# Altium PCB 遥控器副板.PcbDoc
Units mil, origin at the board's own origin, x right, y up, seen from the top; angles counter-clockwise.
Board outline 1584.83 x 3160.29 mil, 2 copper layers (Top Layer, Bottom Layer); 39 components, 34 nets, 151 pads, 108 vias.
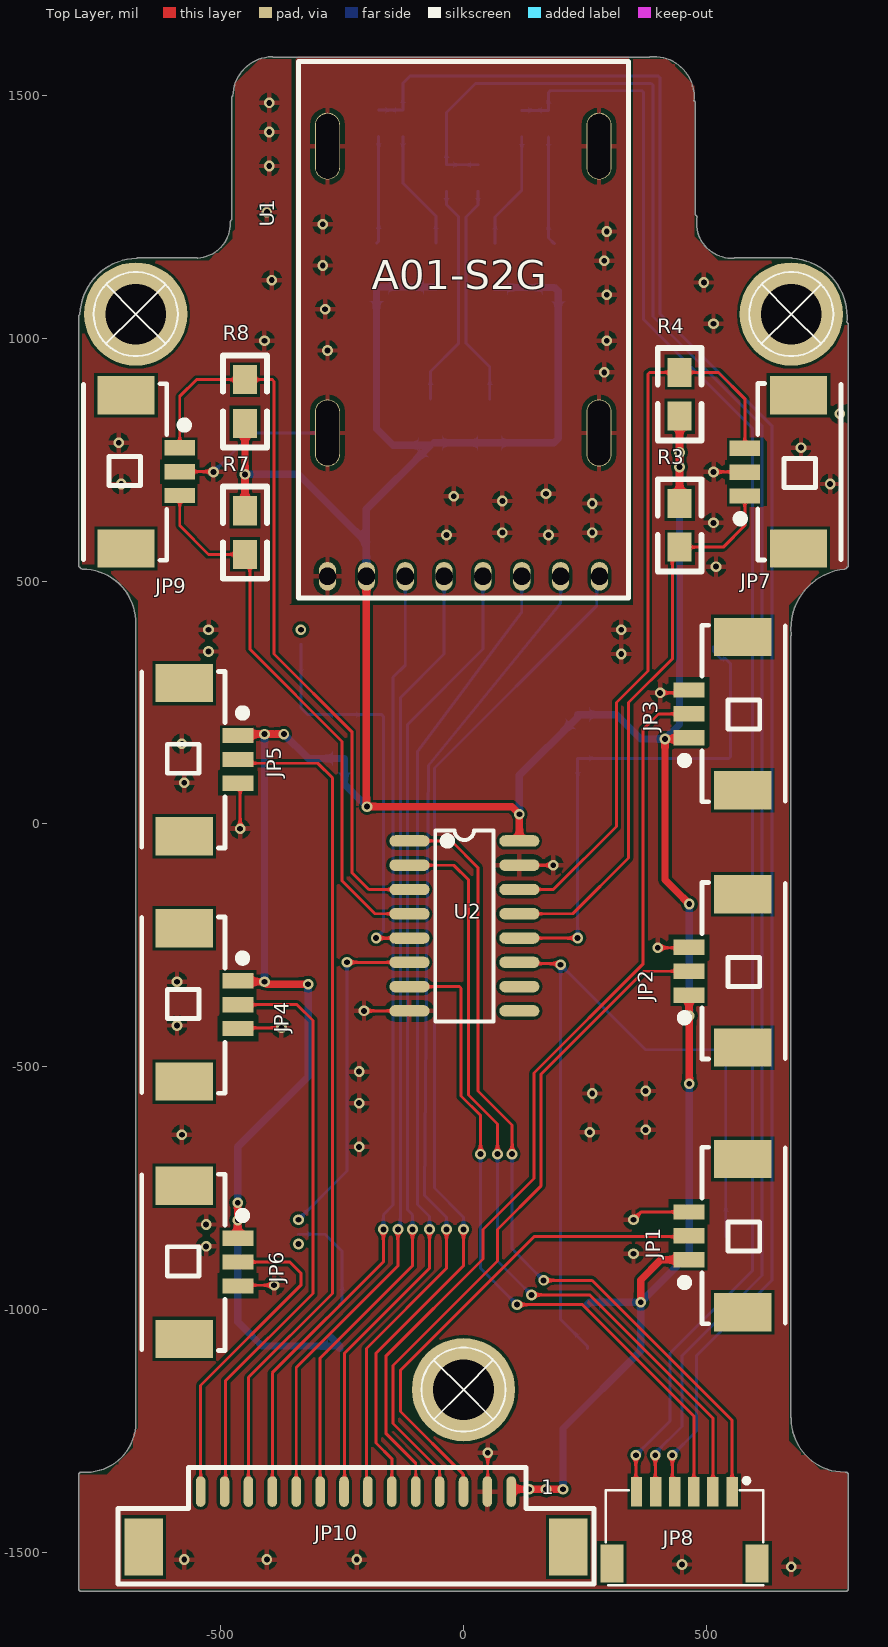
[diagram p0: Top Layer view]
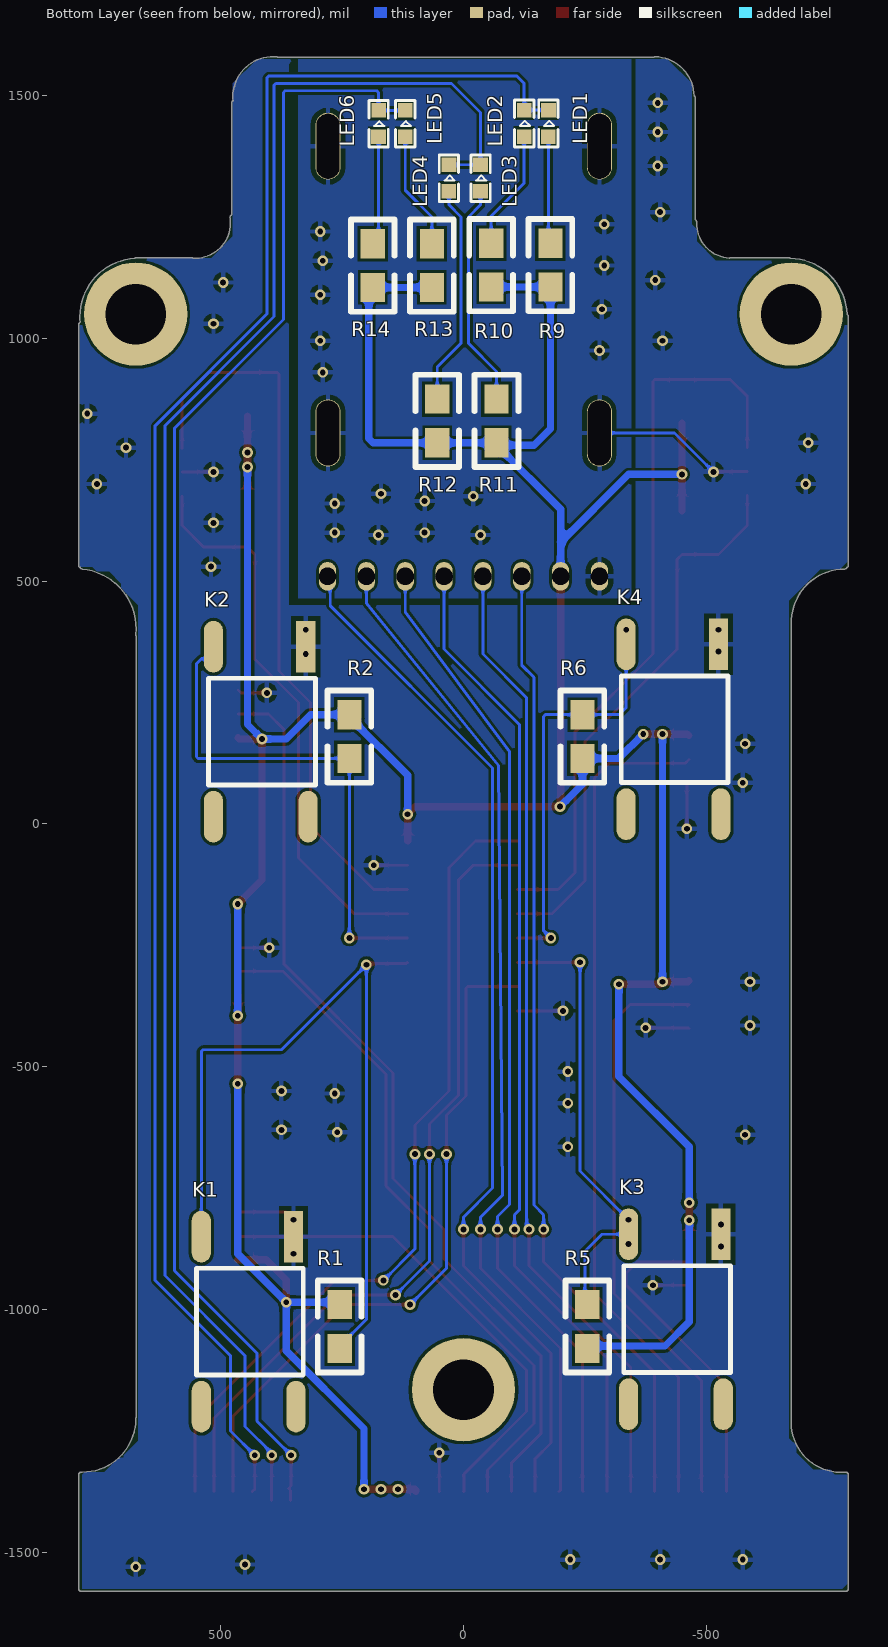
[diagram p1: Bottom Layer view, seen from below]
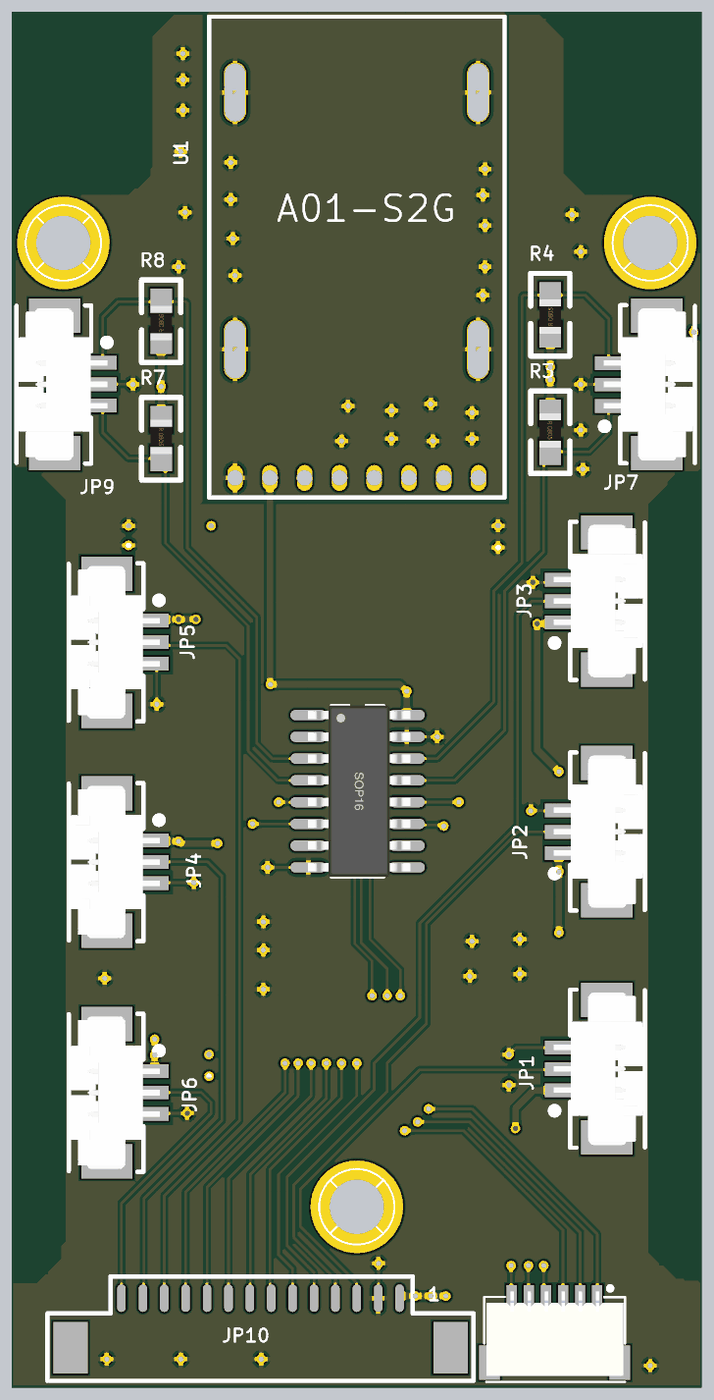
[diagram p2: 3D render of the assembled board from above, using the file's embedded part models]
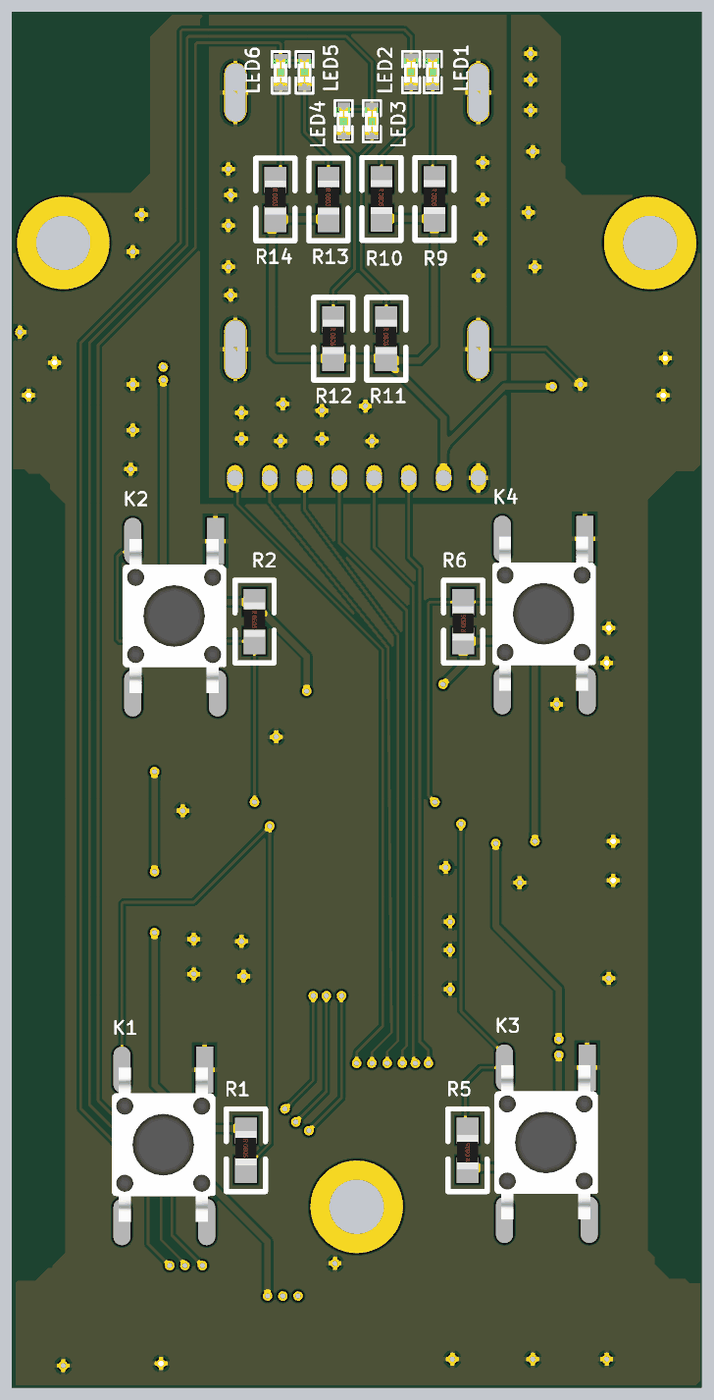
[diagram p3: 3D render of the assembled board from below, using the file's embedded part models]

## Layer stack, top to bottom
Top Solder: solder mask 0.4, Solder Resist, Dk 3.5
Top Layer: signal copper 1.4
Dielectric 1: dielectric 12.6, FR-4, Dk 4.8
Bottom Layer: signal copper 1.4
Bottom Solder: solder mask 0.4, Solder Resist, Dk 3.5

## Board outline
-792.42,-1340 cw(c-787.4,-1340) -786.2,-1335.13 cw(c-785,-1340) -784.65,-1335 ccw(c-777.5,-1232.5) -674.75,-1232.5 ccw(c-777.5,-1232.5) -674.93,-1226.43 cw(c-670.13,-1225) -675.14,-1225 -675.14,420.25 ccw(c-785,415) -785,524.99 cw(c-785,530) -789.54,527.86 cw(c-787.4,532.4) -792.42,532.4 -792.42,1045 cw(c-787.4,1045) -789.94,1049.33 cw(c-670,1045) -673.16,1164.97 cw(c-670.13,1160.98) -670.13,1166 -550,1166 cw(c-550,1160.98) -547.23,1165.17 ccw(c-552.5,1237.5) -479.97,1237.5 ccw(c-552.5,1237.5) -480.01,1239.84 cw(c-475,1240) -477.46,1244.37 -477.46,1495 cw(c-472.44,1495) -475.04,1499.29 cw(c-392.5,1497.5) -395.16,1580.01 cw(c-395,1575) -392.57,1579.39 383.25,1579.39 cw(c384.97,1574.67) 384.48,1579.67 cw(c392.5,1497.5) 475.06,1497.5 cw(c392.5,1497.5) 474.67,1489.49 cw(c472.44,1485) 477.46,1485 477.46,1254.23 cw(c475.89,1249.46) 480.9,1249.46 cw(c475.89,1249.46) 480.84,1248.69 ccw(c552.5,1237.5) 557.17,1165.13 cw(c560,1160.98) 560,1166 673.7,1166 cw(c673.7,1160.98) 676.94,1164.81 cw(c670,1045) 790.02,1045 cw(c670,1045) 789.42,1033.05 cw(c787.4,1028.46) 792.42,1028.46 792.42,532.4 cw(c787.4,532.4) 789.54,527.86 cw(c785,530) 785.49,525.01 ccw(c797.5,402.5) 674.99,390.49 cw(c670,390) 675.02,390 cw(c670,390) 673.73,386.64 673.73,-1221.64 cw(c670,-1225) 675.02,-1225 ccw(c785,-1225) 785,-1334.98 cw(c785,-1340) 786.2,-1335.13 cw(c787.4,-1340) 792.42,-1340 792.42,-1575.24 cw(c787.4,-1575.24) 787.4,-1580.25 -787.4,-1580.25 cw(c-787.4,-1575.24) -792.42,-1575.24

## Design rules (kind name [scope] priority, off if disabled: settings)
Clearance [All] p1: gap=6 ignorepadtopadclearanceinfootprint=FALSE
PlaneClearance [All] p1: clearance=8
PolygonConnect [All] p1: connectstyle=Relief reliefconductorwidth=10 reliefentries=4 polygonreliefangle="90 Angle" airgapwidth=10
RoutingVias [All] p1: holewidth=12 width=22 viastyle="Through Hole" minholewidth=12 minwidth=22 maxholewidth=12 maxwidth=22
SilkToSilkClearance [All] p1: silktosilkclearance=2
SilkToSolderMaskClearance [IsPad] p1: minsilkscreentomaskgap=2 clearancetoexposedcopper=TRUE
SolderMaskExpansion [All] p1: expansion=4 istentingtop=FALSE
UnRoutedNet [All] p1: checkbadconnections=TRUE
Width POWER [InNetClass('POWER')] p1: maxlimit=60 minlimit=12 preferedwidth=15
Width Width_1 [All] p2: maxlimit=6 minlimit=6 preferedwidth=6
26 further rules are at their usual default settings.

## Classes and differential pairs
net class POWER: MCU_3V3
component class 遥控器副板: JP1 JP2 JP3 JP4 JP5 JP7 JP8 JP9 JP10 K1 K2 K3 K4 LED1 LED2 LED3 LED4 LED5 LED6 R1 R2 R3 R4 R5 R6 R8 R9 R10 R11 R12 R13 R14 U1 U2

## Components (designator, comment, footprint, x,y, rotation, side; value= is the part's Value field where it differs from the comment)
HOLE1 "M3" "M3 5.4MM" -675,1050 r0 top
HOLE2 "M3" "M3 5.4MM" 675,1050 r0 top
HOLE3 "M3" "M3 5.4MM" 0,-1165 r0 top
JP1 "PORT-L" "MX 1.25-WS-3P" 575,-847.76 r90 top
JP2 "PORT-L" "MX 1.25-WS-3P" 575,-302.76 r90 top
JP3 "PORT-L" "MX 1.25-WS-3P" 575,227.24 r90 top locked
JP4 "PORT-R" "MX 1.25-WS-3P" -575,-372.76 r270 top
JP5 "PORT-R" "MX 1.25-WS-3P" -575,132.24 r270 top locked
JP6 "PORT-YT" "MX 1.25-WS-3P" -575,-902.76 r270 top locked
JP7 "PORT-ANJIAN" "MX 1.25-WS-3P" 690,725 r90 top
JP8 "PORT-HC&LED" "SH1.0 S-W-6P" 455.11,-1456 r0 top locked
JP9 "PORT-ANJIAN" "MX 1.25-WS-3P" -695,725 r270 top
JP10 "PORT-PWR&JS&NRF" Headr14 -221.46,-1432.09 r180 top
K1 "KEY" SMD-6X6X8 350,-850 r270 bottom locked
K2 "KEY" SMD-6X6X8 325,365 r270 bottom locked
K3 "KEY" SMD-6X6X8 -530,-845 r270 bottom
K4 "KEY" SMD-6X6X8 -525,370 r270 bottom
LED1 "红色" "LED 0603R" -174.94,1442.5 r90 bottom
LED2 "红色" "LED 0603R" -124.94,1442.5 r90 bottom
LED3 "红色" "LED 0603R" -35,1330 r90 bottom
LED4 "红色" "LED 0603R" 30,1330 r90 bottom
LED5 "红色" "LED 0603R" 120,1442 r90 bottom
LED6 "红色" "LED 0603R" 175,1442 r90 bottom
R1 "10K" 0805R 255,-990 r270 bottom
R2 "10K" 0805R 235,225 r270 bottom
R3 "10K" 0805R 445,660 r270 top
R4 "10K" 0805R 445,840 r90 top
R5 "10K" 0805R -255,-1080 r90 bottom
R6 "10K" 0805R -245,135 r90 bottom
R7 "10K" 0805R -450,645 r270 top
R8 "10K" 0805R -450,825 r90 top
R9 "510R" 0805R -179,1196 r270 bottom
R10 "510R" 0805R -57,1196 r270 bottom
R11 "510R" 0805R -67.96,874.95 r270 bottom
R12 "510R" 0805R 54.04,874.95 r270 bottom
R13 "510R" 0805R 65,1195 r270 bottom
R14 "510R" 0805R 187,1195 r270 bottom
U1 "A01-S2G" A01-S2G 0,510 r0 top
U2 "74HC165" SOP16 -111.38,-35 r0 top

## Footprints (in the part's own frame and the unit in brackets; to place one, negate y for a bottom-side part, rotate by r counter-clockwise, add the part's x,y. Pads: shape width x height; smd on the part's side, far side on the other; paste and mask are expansions set on the pad)
0805R [mil]
  rect 60x50 smd: 1(0,0) 2(90,0)
  silkscreen extent -50,-45 140,45, body extent 1,-25 80,25, height 15
A01-S2G [mm] "A01-S2G"
  oval 1.3x3.5 hole 1.2 slot 3.4 at 90 deg: 0(-7.112,7.5) 0(-7.112,22.5) 0(7.088,7.5) 0(7.088,22.5)
  oval 0.9x1.5 hole 0.9: 1(-7.112,0) 2(-5.08,0) 3(-3.048,0) 4(-1.016,0) 5(1.016,0) 6(3.048,0) 7(5.08,0) 8(7.112,0)
  silkscreen extent -8.64,-1.14 8.64,26.92
Headr14 [mm] "14pin卧贴接插件"
  oval 0.5x1.6 smd: 1(-8.125,-1.45) 2(-6.875,-1.45) 3(-5.625,-1.45) 4(-4.375,-1.45) 5(-3.125,-1.45) 6(-1.875,-1.45) 7(-0.625,-1.45) 8(0.625,-1.45) 9(1.875,-1.45) 10(3.125,-1.45) 11(4.375,-1.45) 12(5.625,-1.45) 13(6.875,-1.45) 14(8.125,-1.45)
  rect 2x3 smd: ""(-11.1,1.45) ""(11.1,1.45)
  silkscreen extent -12.45,-2.72 12.45,3.38
"LED 0603R" [mil]
  rect 30x30 smd: 1(-27,0) 2(27.5,-0.06)
  silkscreen extent -48,-20 48,20, body extent -31,-16 31,16, height 24
"M3 5.4MM" [mm] "M3螺丝孔，"
  round 5.4 hole 3.175: 0(0,0)
  silkscreen extent -2.2,-2.2 2.2,2.2
"MX 1.25-WS-3P" [mm]
  rect 2x3 smd: 0(-4.007,0) 0(4.007,0)
  rect 0.8x1.6 smd: 1(-1.264,2.811) 2(-0.014,2.811) 3(1.236,2.811)
  silkscreen extent -4.61,-2.23 4.62,3.25, body extent -4.45,-2.1 4.45,3.09, height 3.4
"SH1.0 S-W-6P" [mm]
  rect 1.2x2 smd: 0(-3.8,-1.7) 0(3.8,-1.7)
  rect 0.6x1.55 smd: 1(2.489,2.057) 2(1.489,2.057) 3(0.489,2.057) 4(-0.511,2.057) 5(-1.511,2.057) 6(-2.511,2.057)
  silkscreen extent -4.11,-2.83 4.11,2.76, body extent -3.99,-2.48 4.01,2.47, height 2.9
SMD-6X6X8 [mm]
  rect 2.7x1 smd: 1(0,0)
  oval 2.7x1 smd: 2(8.89,0.127) 3(0,-4.826) 4(8.89,-4.826)
  silkscreen extent 1.65,-5.08 7.24,0.51, body extent -0.13,-5.41 8.87,0.59, height 7.95
SOP16 [mm]
  oval 2.1x0.6 smd: 1(0,0) 2(0,-1.27) 3(0,-2.54) 4(0,-3.81) 5(0,-5.08) 6(0,-6.35) 7(0,-7.62) 8(0,-8.89) 9(5.75,-8.89) 10(5.75,-7.62) 11(5.75,-6.35) 12(5.75,-5.08) 13(5.75,-3.81) 14(5.75,-2.54) 15(5.75,-1.27) 16(5.75,0)
  silkscreen extent 1.35,-9.45 4.4,0.56, body extent -0.04,-9.45 5.97,0.56, height 1.9

## Part data
HOLE1 HOLE2 HOLE3: "铜柱孔", BOM名称=铜柱孔, 学习资源=www.ooocke.com, 版权归属=源创客
JP1 JP2 JP3 JP4 JP5 JP6 JP7 JP9: library part "Header 3", "3P接插件", BOM名称=3P接插件, 学习资源=www.ooocke.com, 版权归属=源创客
JP8: library part "Header 6", "6P接插件", BOM名称=6P接插件, 学习资源=www.ooocke.com, 版权归属=源创客
JP10: library part "HEADER 14", "卧贴 14PIN 1.25mm"
LED1 LED2 LED3 LED4 LED5 LED6: library part LED-SMD, "贴片LED", BOM名称=贴片LED, 学习资源=www.ooocke.com, 版权归属=源创客
R1 R2 R3 R4 R5 R6 R7 R8: library part RES
R9 R10 R11 R12 R13 R14: library part R, "贴片电阻", BOM名称=贴片电阻, 学习资源=www.ooocke.com, 版权归属=源创客

## Via types
v1: diameter 22, hole 12, Top Layer to Bottom Layer, 108 vias

## Nets (pads, with @x,y where several pads share a name; then routed paths per layer and width w, separated by ;. In a path a pad name is that pad's centre, name@x,y a point inside that pad or via, vN(x,y) a via of type N, cw(c..) or ccw(c..) an arc to the next point about the centre after c; other vN are vias at no path point)
GND: JP1.3 JP2.3 JP3.3 JP4.3 JP5.3 JP6.3 JP7.2 JP9.2 JP10.2 K1.1 K2.1 K3.1 K4.1 U1.0 U1.1 U2.8 U2.15 | length 1154.1
  Top Layer w6: JP9.2 -515.54,725.54 v1(-515,725) ; JP6.3 -462.92,-950 v1(-390,-950) ; JP4.3 -462.92,-420 v1(-375,-420) ; JP5.3 -460,79.23 v1(-460,-10) ; v1(-205,-385) U2.8 ; JP10.2 50,-1374.21 v1(50,-1295) ; U2.15 v1(185,-85) ; v1(350,-815) 365.91,-799.09 JP1.3 ; v1(400,-255) 463.43,-255 JP2.3 ; v1(405,270) 458.43,270 JP3.3 ; v1(515,725) 578.8,725 JP7.2
  Bottom Layer w6: v1(-515,725) -434.72,805.28 U1.0@-280,805.28
  other v1: 675,-1530 450,-1525 -575,-1515 -405,-1515 -220,-1515 350,-885 -530,-870 -530,-825 -215,-665 -580,-640 260,-635 375,-630 -215,-575 265,-555 375,-550 -215,-510 -590,-415 -590,-325 -575,85 -580,165 325,350 -525,355 -525,400 325,400 520,530 -35,595 175,595 80,600 265,600 515,620 265,660 80,665 -20,675 170,680 -705,700 755,700 695,775 -710,785 775,845 290,930 -280,975 -410,995 295,995 515,1030 -285,1060 295,1090 495,1115 -395,1120 -290,1150 290,1160 295,1220 -290,1235 -405,1260 -400,1355 -400,1425 -400,1485
HC-CP: JP8.2 U2.2 | length 1672.8
  Top Layer w6: U2.2 -20,-85 10,-115 10,-558.03 70,-618.03 v1(70,-680) ; v1(140,-970) 260,-970 513.74,-1223.74 JP8.2
  Bottom Layer w6: v1(70,-680) 70,-900 v1(140,-970)
HC_D0: K1.3 R1.2 U2.11 | length 1695.3
  Top Layer w6: U2.11 117.5,-287.5 197.5,-287.5 v1(200,-290)
  Bottom Layer w6: R1.2 255,-1075 200,-1020 v1(200,-290) 375,-465 536.49,-465 540,-468.51 K1.3
HC_D1: K2.3 R2.2 U2.12 | length 1053.2
  Top Layer w6: U2.12 v1(235,-235)
  Bottom Layer w6: v1(235,-235) R2.2 546.49,135 550,138.51 550,330 540.17,339.83 530.41,339.83 515,355.24 K2.3
HC_D2: JP7.1 R3.2 U2.13 | length 1169.7
  Top Layer w6: U2.13 225,-185 340,-70 340,250 430,340 430,555 R3.2 535,570 579.35,614.35 JP7.1
HC_D3: JP7.3 R4.2 U2.14 | length 1537.6
  Top Layer w6: U2.14 185,-135 315,-5 315,250 380,315 380,926.49 383.51,930 525,930 579.35,875.65 JP7.3
HC_D4: K3.3 R5.2 U2.6 | length 916.6
  Top Layer w6: v1(-240,-285) U2.6
  Bottom Layer w6: K3.3 -285,-845 -250,-880 -250,-985 R5.2 ; v1(-340,-815) -240,-715 v1(-240,-285)
  other v1: -340,-865
HC_D5: K4.3 R6.2 U2.5 | length 839
  Top Layer w6: v1(-180,-235) U2.5
  Bottom Layer w6: K4.3 -335,240 -320,225 -168.51,225 -165,221.49 -165,-220 v1(-180,-235)
  other v1: -335,400
HC_D6: JP9.3 R7.2 U2.4 | length 1142.5
  Top Layer w6: JP9.3 -584.35,614.35 -525,555 R7.2 -440,545 -440,360 -250,170 -250,-116.97 -181.97,-185 U2.4
HC_D7: JP9.1 R8.2 U2.3 | length 1526.8
  Top Layer w6: JP9.1 -584.35,880.65 -550,915 R8.2 -393.51,915 -390,911.49 -390,350 -230,190 -230,-100 -195,-135 U2.3
HC_PL: JP8.1 U2.1 | length 1724.4
  Top Layer w6: U2.1 -25,-35 30,-90 30,-550 100,-620 v1(100,-680) ; v1(165,-940) 265,-940 553.11,-1228.11 JP8.1
  Bottom Layer w6: v1(100,-680) 100,-875 v1(165,-940)
HC_Q7: JP8.3 U2.7 | length 1422
  Top Layer w6: U2.7 -8.51,-335 -5,-338.51 -5,-560 35,-600 v1(35,-680) ; v1(110,-990) 245,-990 474.37,-1219.37 JP8.3
  Bottom Layer w6: v1(35,-680) 35,-915 v1(110,-990)
JS_L_LOCK: JP3.2 JP10.5 | length 1922.5
  Top Layer w6: JP10.5 -98.43,-1316.57 -160,-1255 -160,-1096.06 40,-896.06 40,-835 145,-730 145,-513.03 370,-288.03 370,195 401.7,226.7 JP3.2
JS_L_X: JP1.2 JP10.3 | length 1012.8
  Top Layer w6: JP10.3 -0.65,-1374.35 -0.65,-1339.35 -130,-1210 -130,-1125 145,-850 462.65,-850 JP1.2
JS_L_Y: JP2.2 JP10.4 | length 1418
  Top Layer w6: JP10.4 -49.21,-1330.79 -145,-1235 -145,-1115 70,-900 70,-835 160,-745 160,-515 371.7,-303.3 JP2.2
JS_R_X: JP4.2 JP10.13 | length 1217.3
  Top Layer w6: JP10.13 -490,-1372.87 -490,-1146.72 -310,-966.72 -310,-405 -342.79,-372.21 JP4.2 JP4.2@-461.56,-375
JS_R_Y: JP5.2 JP10.12 | length 1751.6
  Top Layer w6: JP5.2 -456.56,125 -300,125 -270,95 -270,-966.72 -442.91,-1139.63 JP10.12
LED1: JP8.4 LED1.2 LED2.2 | length 3736.4
  Top Layer w6: v1(430,-1300) 430,-1370 JP8.4
  Bottom Layer w6: LED1.2 LED2.2 -125,1525 -110,1540 401.49,1540 405,1536.49 405,1050 635,820 635,-940 480,-1095 480,-1250 v1(430,-1300)
LED2: JP8.5 LED3.2 LED4.2 | length 3723.6
  Top Layer w6: v1(395,-1300) 395,-1374.37 JP8.5 JP8.5@395.63,-1393.7
  Bottom Layer w6: LED4.2 LED3.2 -35.06,1464.94 25,1525 386.49,1525 390,1521.49 390,1045 615,820 615,-930 450,-1095 450,-1240.67 395,-1295.67 v1(395,-1300)
LED3: JP8.6 LED5.2 LED6.2 | length 3388
  Top Layer w6: v1(355,-1300) 355,-1363.74 360,-1368.74 355,-1373.74 JP8.6 JP8.6@356.26,-1393.7
  Bottom Layer w6: LED5.2 LED6.2 174.94,1506.49 178.45,1510 367.49,1510 371,1506.49 371,1039 595,815 595,-920 425,-1090 425,-1230 v1(355,-1300)
MCU_3V3: JP1.1 JP2.1 JP3.1 JP4.1 JP5.1 JP6.1 JP10.1 R1.1 R2.1 R3.1 R4.1 R5.1 R6.1 R7.1 R8.1 R9.2 R10.2 R11.2 R12.2 R13.2 R14.2 U1.2 U2.16 | length 8326.9
  Top Layer w15: v1(-465,-780) v1(-465,-816.17) -465,-852.35 JP6.1 ; JP4.1 -462.35,-325 v1(-410,-325) -405,-330 v1(-320,-330) ; JP5.1 -461.35,185 v1(-410,185) v1(-370,185) ; R7.1 v1(-450,720) R8.1 ; U1.2 -200,36.89 v1(-198.75,35.64) 99.36,35.64 105,30 110,25 v1(115,20) 115,1.89 ; JP10.1 98.43,-1372.16 100.59,-1370 v1(135,-1370) v1(170,-1370) v1(205,-1370) ; U2.16 115,0 ; v1(365,-985) 365,-939.01 406.5,-897.51 JP1.1 JP1.1@465,-898.17 ; R3.1 v1(445,735) v1(445,765) R4.1 ; v1@464.35,-395 JP2.1 ; JP3.1 461.86,175 v1(415,175) 415,-115 v1(465,-165) ; v1(465,-535) v1(465,-395)
  Bottom Layer w15: v1(-465,-816.17) -465,-1025 -415,-1075 -260,-1075 R5.1 -255,-1075 R5.1@-272.5,-1057.5 ; v1(-465,-780) -465,-665 -320,-520 v1(-320,-330) ; v1(-450,720) -340,720 -200,580 ; v1(-410,-325) v1(-410,185) ; v1(-370,185) -320,135 R6.1 -245,81.89 v1(-198.75,35.64) ; U1.2 -200,580 ; R11.2@-60,784.95 186.21,784.95 195,793.74 195,1097 R14.2 R13.2 ; R10.2 R9.2 -179,814 -145,780 -67.96,780 -67.96,779.95 -200,647.91 -200,580 ; v1(115,20) 115,100 235,220 R2.1 315,225 365,175 v1(415,175) 445,205 v1(445,735) ; v1(205,-1370) 205,-1245 365,-1085 v1(365,-985) ; R1.1 260,-985 v1(365,-985) ; v1(465,-535) 465,-885 v1(365,-985) ; v1(465,-395) v1(465,-165)
NetLED1_1: LED1.1 R9.1 | length 221.2
  Bottom Layer w6: R9.1 -174.94,1200.06 LED1.1
NetLED2_1: LED2.1 R10.1 | length 247.6
  Bottom Layer w6: LED2.1 -124.94,1319.94 -57,1252 R10.1
NetLED3_1: LED3.1 R11.1 | length 462.4
  Bottom Layer w6: R11.1 -67.96,932.04 -10,990 -10,1250 -35,1275 LED3.1
NetLED4_1: LED4.1 R12.1 | length 458.7
  Bottom Layer w6: LED4.1 30,1275 5,1250 5,990 54.04,940.96 R12.1
NetLED5_1: LED5.1 R13.1 | length 242.8
  Bottom Layer w6: R13.1 65,1250 120,1305 LED5.1
NetLED6_1: LED6.1 R14.1 | length 225
  Bottom Layer w6: LED6.1 175,1207 R14.1
NRF_CE: JP10.11 U1.3 | length 1998.4
  Top Layer w6: JP10.11 -393.7,-1130.42 -165,-901.72 v1(-165,-835)
  Bottom Layer w6: v1(-165,-835) -165,-805 -145,-785 -145,301.97 -120,326.97 U1.3
NRF_CSN: JP10.10 U1.4 | length 2011.1
  Top Layer w6: JP10.10 -344.49,-1119.49 -135,-910 v1(-135,-835)
  Bottom Layer w6: v1(-135,-835) -135,-830.67 -130,-825.67 -130,260 -40,350 U1.4
NRF_IRQ: JP10.6 U1.8 | length 2138.6
  Top Layer w6: JP10.6 -147.64,-1307.36 -180,-1275 -180,-1090 0,-910 v1(0,-835)
  Bottom Layer w6: v1(0,-835) 0,-810 -60,-750 -60,115 274.37,449.37 274.37,504.37 U1.8
NRF_MISO: JP10.7 U1.7 | length 2069.8
  Top Layer w6: JP10.7 -199.47,-1372.38 -199.47,-1343.52 -200,-1342.99 -200,-1080 -35,-915 v1(-35,-835)
  Bottom Layer w6: v1(-35,-835) -35,-810 -80,-765 -80,-760.03 -72,119.97 200,455 U1.7
NRF_MOSI: JP10.8 U1.6 | length 2039.5
  Top Layer w6: JP10.8 -245,-1373.94 -245,-1090 -70,-915 v1(-70,-835)
  Bottom Layer w6: v1(-70,-835) -70,-808.49 -95,-783.49 -95,147.84 120,436.89 U1.6
NRF_SCK: JP10.9 U1.5 | length 2032.2
  Top Layer w6: JP10.9 -295.28,-1100.28 -105,-910 v1(-105,-835)
  Bottom Layer w6: v1(-105,-835) -105,-805 -115,-795 -115,205 40,360 U1.5
YUNTAI: JP6.2 JP10.14 | length 674.3
  Top Layer w6: JP10.14 -541.34,-1156.34 -335,-950 -335,-925 -357.79,-902.21 JP6.2
pads on no net: HOLE1.0 HOLE2.0 HOLE3.0 JP1.0 JP2.0 JP3.0 JP4.0 JP5.0 JP6.0 JP7.0 JP8.0 JP9.0 JP10. K1.2 K1.4 K2.2 K2.4 K3.2 K3.4 K4.2 K4.4 U2.9 U2.10

## Polygon pours and split planes (outlines as drawn)
GND on Bottom Layer "GND_L02_P001" (solid, pour order 1): -355,1575 -420,1575 -470,1525 -470,1235 -480,1225 -480,1200 -520,1160 -650,1160 -650,1075 -680,1045 -790,1045 -790,540 -775,525 -735,525 -670,460 -670,-1265 -685,-1280 -685,-1295 -720,-1330 -755,-1330 -765,-1340 -790,-1340 -790,-1565 -780,-1575 785,-1575 785,-1340 780,-1335 740,-1335 710,-1305 700,-1305 700,-1300 670,-1270 670,450 705,485 705,495 730,520 755,520 765,530 790,530 790,1030 770,1050 675,1050 675,1160 670,1165 520,1165 475,1210 475,1525 425,1575 350,1575 360,1565 360,450 -355,450 -360,455 -355,460
GND on Bottom Layer "GND_L02_P000" (solid, pour order 0): -345,1575 340,1575 340,465 -345,465
GND on Top Layer "GND_L01_P004" (solid, pour order 4): -355,1575 -420,1575 -470,1525 -470,1225 -475,1220 -475,1205 -505,1175 -510,1175 -525,1160 -670,1160 -675,1155 -675,1050 -780,1050 -785,1045 -785,535 -755,535 -740,520 -725,520 -725,515 -670,460 -670,-1245 -680,-1255 -680,-1285 -710,-1315 -710,-1320 -715,-1320 -735,-1340 -790,-1340 -790,-1575 790,-1575 790,-1340 785,-1335 755,-1335 750,-1330 735,-1330 705,-1300 695,-1300 695,-1295 670,-1270 670,450 715,495 715,500 740,525 785,525 790,530 790,1030 695,1030 675,1050 675,1160 525,1160 475,1210 475,1520 435,1560 435,1565 430,1565 420,1575 350,1575 350,450 -360,450 -355,455 -355,1570
GND on Top Layer "GND_L01_P003" (solid, pour order 3): -345,1575 -345,465 345,465 340,470 340,1580 -340,1580
no net on Top Layer "NONET_L01_P002" (solid, pour order 2): -345,1575

## Other copper
Top Layer:
  pour cut-out: -621.84,796.5 -546.85,796.5 -546.85,654.58 -621.84,654.58
  pour cut-out: 541.85,795.42 616.84,795.42 625,787.26 625,655 543.35,655 541.85,653.5
  pour cut-out: 428.76,155.74 428.76,295.75 422.85,301.66 505.84,301.66 505.84,159.74 501.84,155.74
  pour cut-out: 426.85,-374.26 501.84,-374.26 501.84,-281.55 504.13,-281.55 505.84,-279.83 505.84,-228.34 422.85,-228.34 426.85,-232.34
  pour cut-out: 422.85,-773.34 505.84,-773.34 501.84,-777.34 501.84,-919.26 426.85,-919.26 422.85,-915.26
  pour cut-out: -501.84,-831.25 -426.85,-831.25 -426.85,-936.82 -422.85,-940.82 -422.85,-977.17 -505.84,-977.17 -505.84,-926.38 -504.95,-926.38 -501.84,-923.26
  pour cut-out: -501.84,-301.25 -501.84,-392.37 -505.84,-396.38 -505.84,-447.17 -422.85,-447.17 -422.85,-394.68 -426.85,-390.68 -426.85,-301.25
  pour cut-out: -501.84,203.75 -501.84,111.74 -502.73,111.74 -505.84,108.62 -505.84,57.83 -422.85,57.83 -423.87,58.84 -423.87,131.19 -426.85,134.18 -426.85,203.75

## Silkscreen, mask and mechanical layers (free items; w line width, h text height)
Mechanical 1:
  lines w10: -787.4,-1340 -787.4,-1575.24 0,-1575.24 787.4,-1575.24 787.4,-1340 ; -787.4,532.4 -787.4,1045 ; -785,-1340 ccw(c-777.5,-1232.5) -670,-1225 ; -785,530 cw(c-785,415) -670,415 ; -785,1045 cw(c-670,1045) -670.13,1160 ; -670.13,-1225 -670.13,420.37 ; -670.13,1160.98 -655.98,1160.98 -550,1160.98 ; -550,1160 ccw(c-552.5,1237.5) -475,1240 ; -472.44,1240 -472.44,1495 ; -470,1495 cw(c-392.5,1497.5) -395,1575 ; -395,1574.37 0,1574.37 385,1574.37 ; 388.3,1574.15 cw(c395.83,1496.98) 472.44,1485 ; 472.44,1255 472.44,1490 ; 475.89,1249.46 ccw(c552.5,1237.5) 560.06,1160.33 ; 560,1160.98 653.7,1160.98 663.7,1160.98 673.7,1160.98 ; 668.71,-1225 668.71,390 ; 668.71,1159.99 cw(c670,1045) 783.87,1028.95 ; 670,-1225 ccw(c785,-1225) 785,-1340 ; 670,390 cw(c797.5,402.5) 785,530 ; 787.4,532.4 787.4,1028.46

## Text inside footprints (layer, text, board x,y; h text height)
JP10: Top Overlay "1" at 160,-1380 h30